# Altium PCB Photodiode7_PCB.PcbDoc
Units mil, origin at the board's own origin, x right, y up, seen from the top; angles counter-clockwise.
Board outline 4100 x 3874.83 mil, 2 copper layers (Top Layer, Bottom Layer); 82 components, 33 nets, 223 pads, 114 vias.
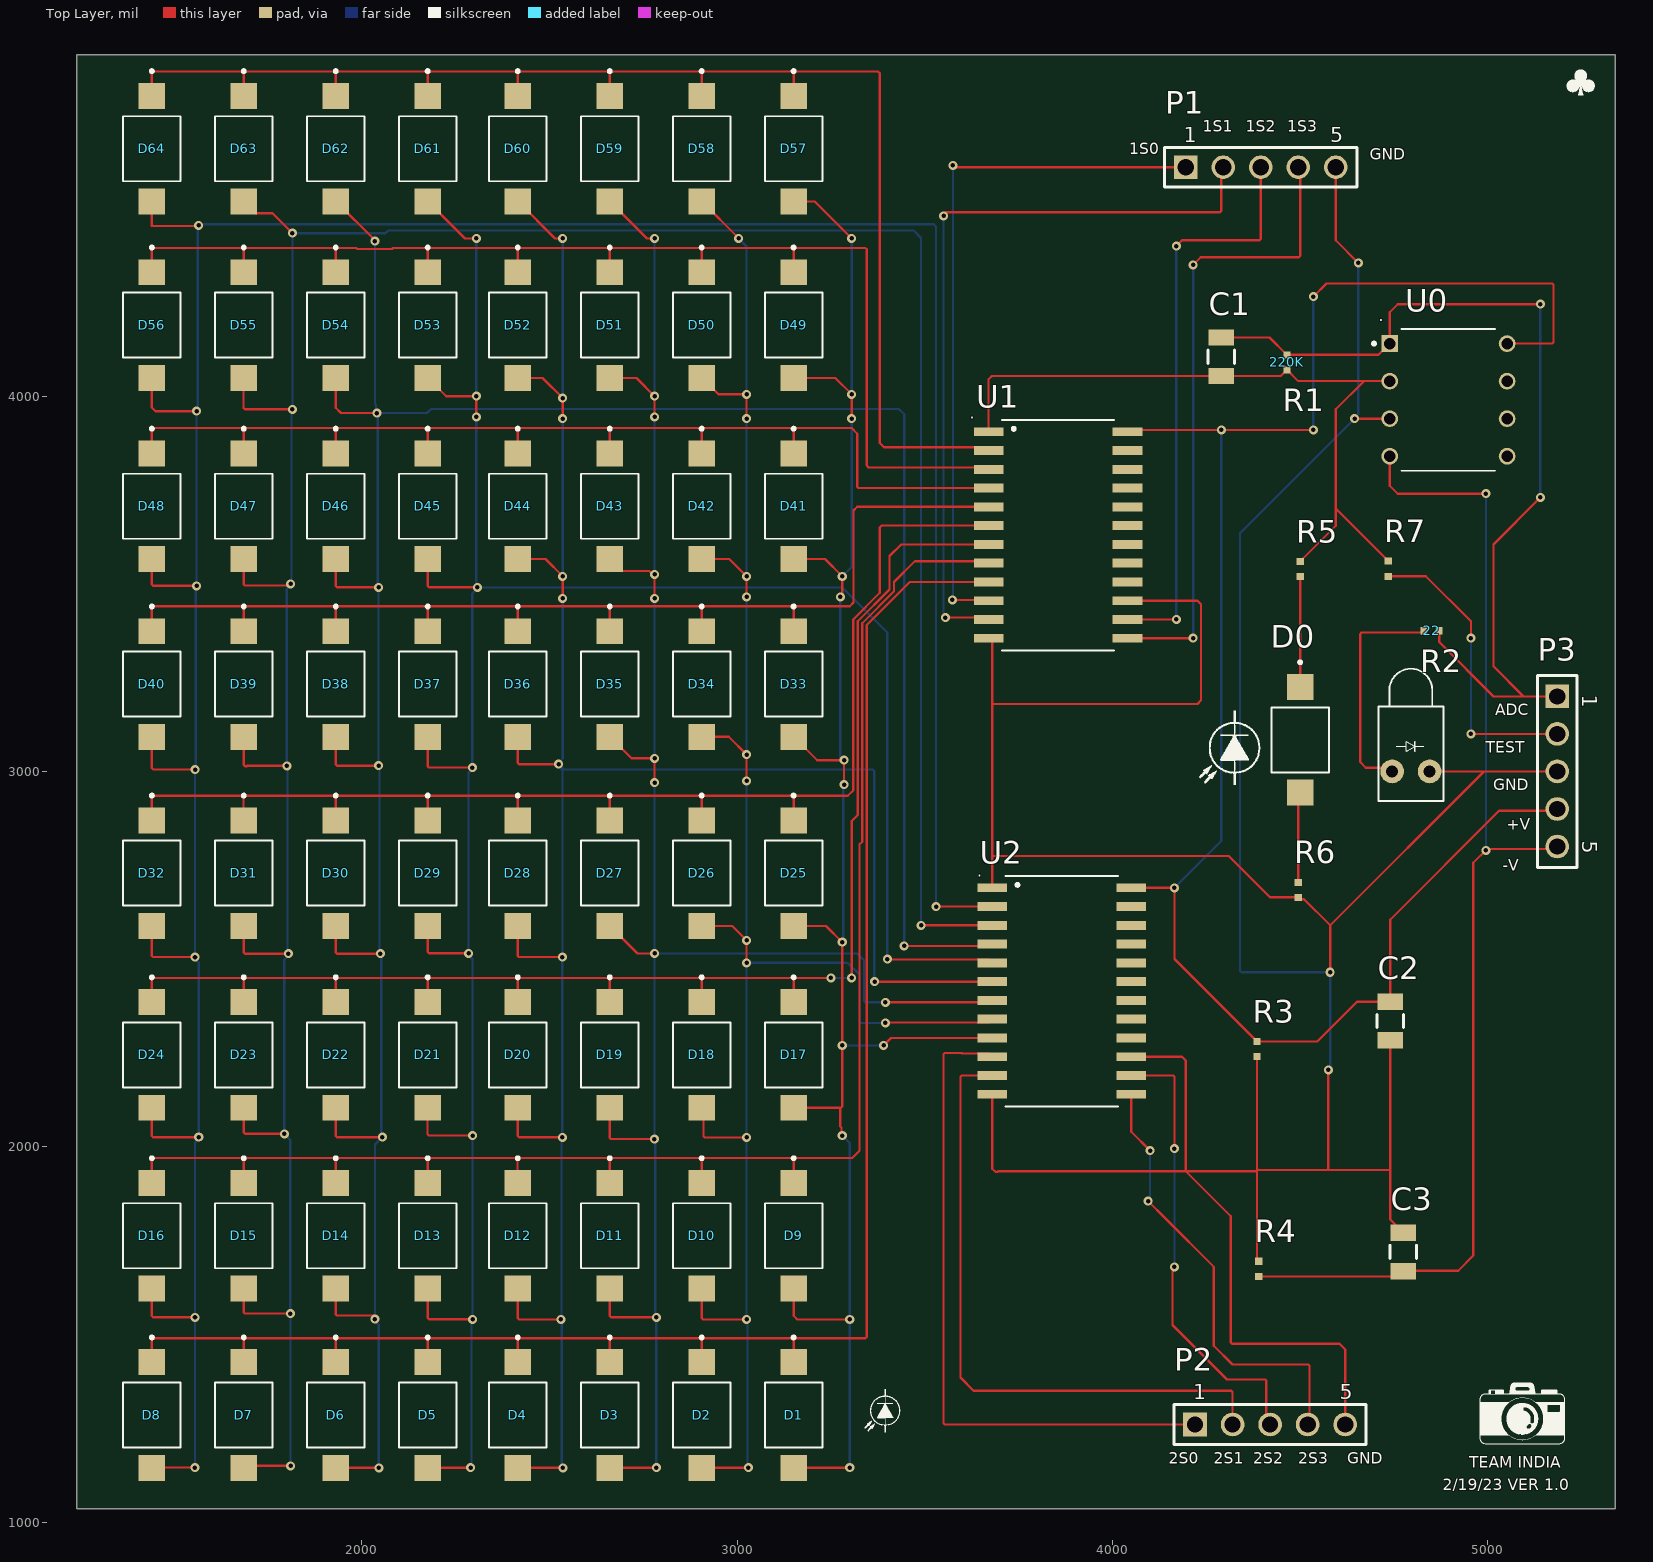
[diagram p0: Top Layer view]
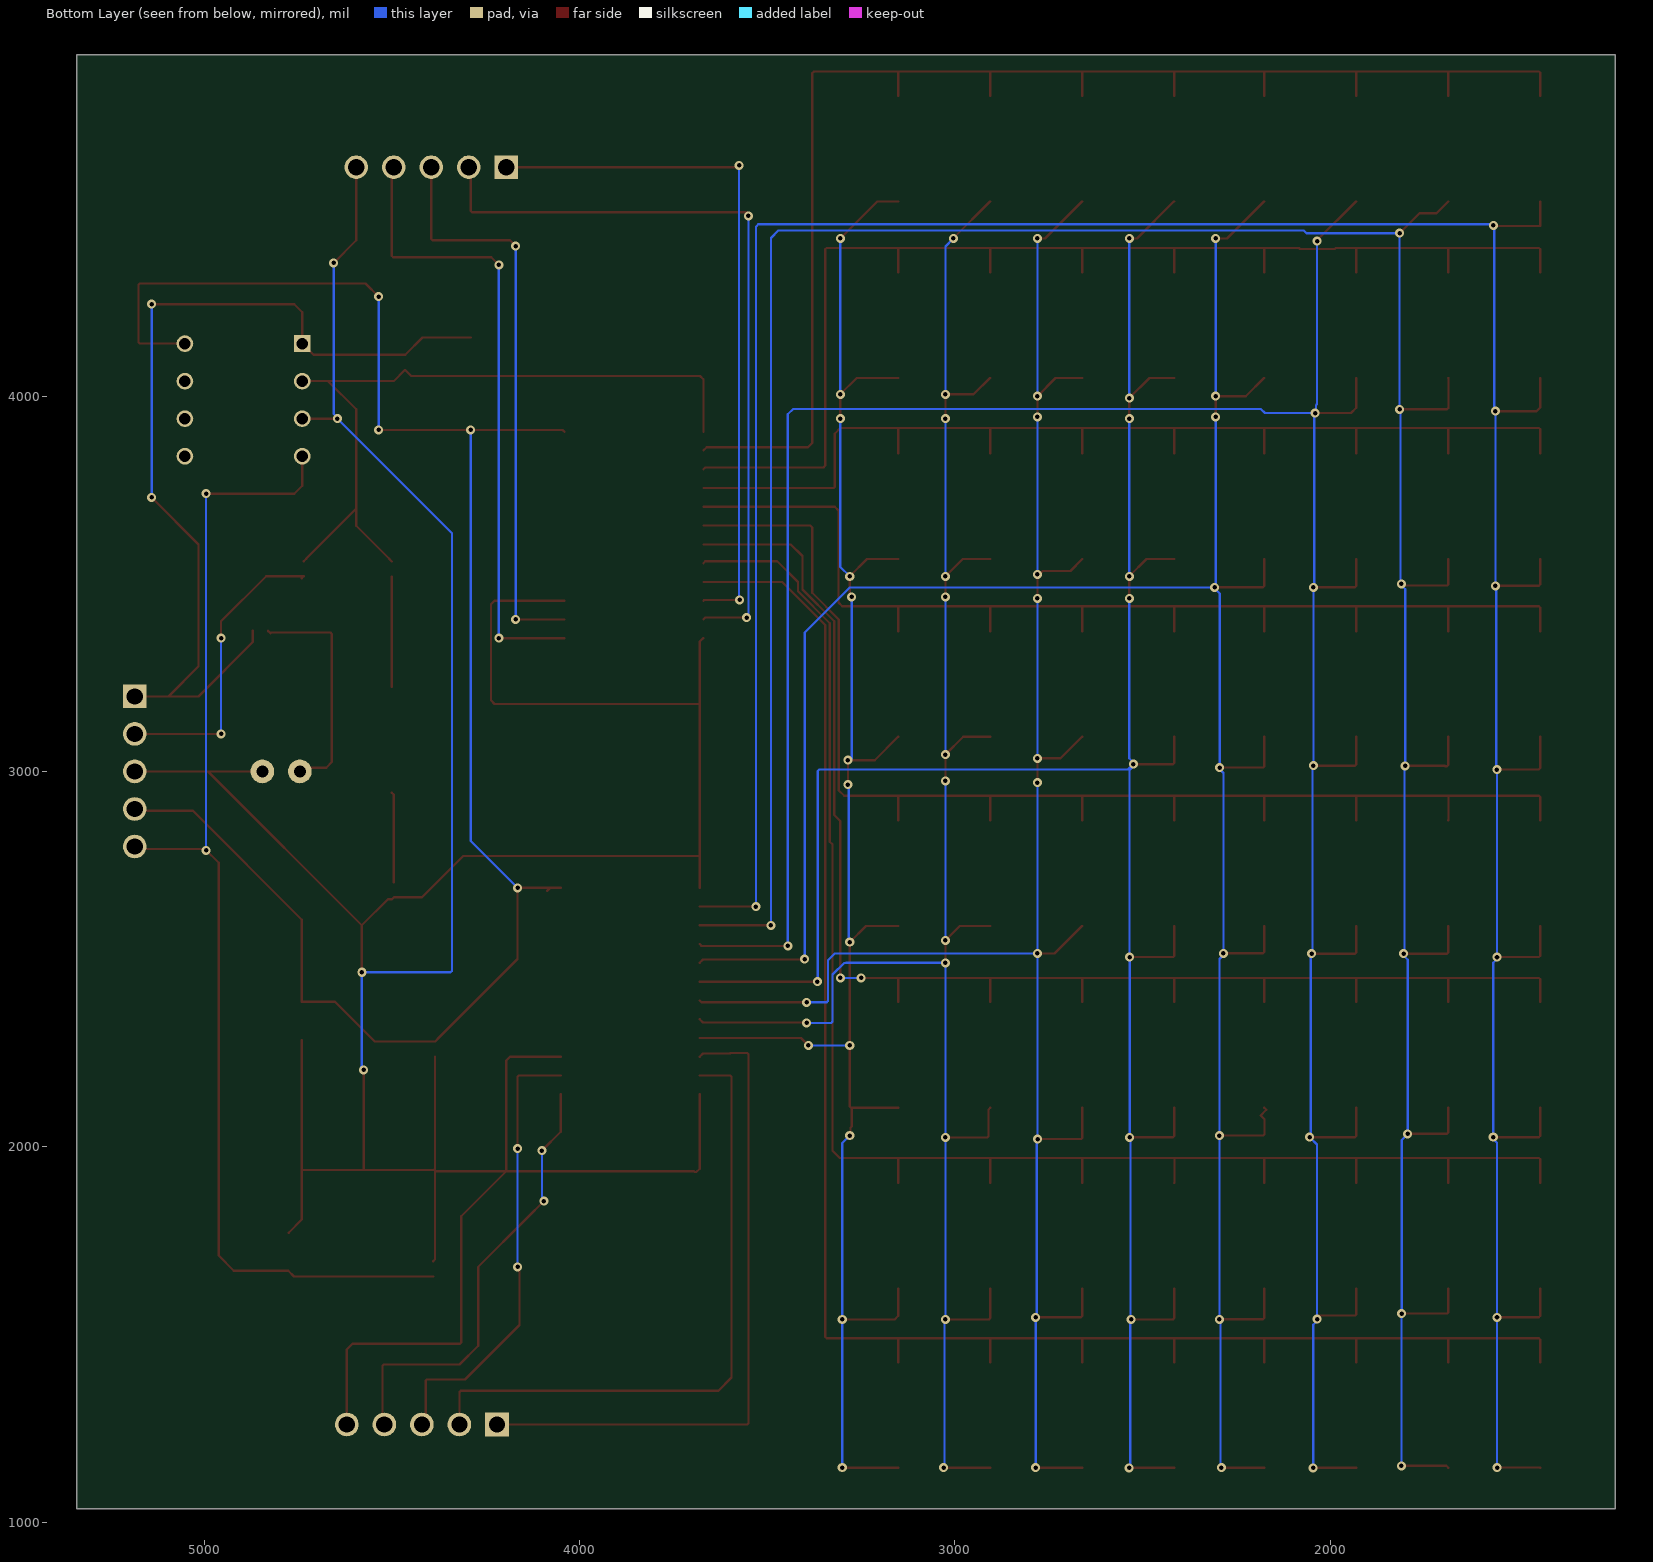
[diagram p1: Bottom Layer view, seen from below]

## Layer stack, top to bottom
Top Solder: solder mask 0.4, Solder Resist, Dk 3.5
Top Layer: signal copper 1.4
Dielectric 1: dielectric 12.6, FR-4, Dk 4.8
Bottom Layer: signal copper 1.4
Bottom Solder: solder mask 0.4, Solder Resist, Dk 3.5

## Board outline
1240,1035.17 1240,4910 5340,4910 5340,1035.17

## Design rules (kind name [scope] priority, off if disabled: settings)
BoardOutlineClearance [All] p1: gap=16 ignorepadtopadclearanceinfootprint=FALSE except(0: Arc-SplitContinuation Track-SplitContinuation SMDPad-SplitContinuation THPad-SplitContinuation Via-SplitContinuation Fill-SplitContinuation Poly-SplitContinuation Region-SplitContinuation Text-SplitContinuation)
Clearance [All] p1: gap=6 ignorepadtopadclearanceinfootprint=FALSE
HoleSize [All] p1: absolutevalues=TRUE maxlimit=245 minlimit=12 maxpercent=80.000 minpercent=20.000
MinimumSolderMaskSliver [All] p1 off: minsoldermaskwidth=10
NetAntennae [All] p1 off: netantennaetolerance=0
PolygonConnect [All] p1: connectstyle=Relief reliefconductorwidth=10 reliefentries=4 polygonreliefangle="90 Angle" airgapwidth=10
RoutingVias [All] p1: holewidth=12 width=24 viastyle="Through Hole" minholewidth=6 minwidth=12 maxholewidth=23.62 maxwidth=47.24
SilkToSilkClearance [All] p1 off: silktosilkclearance=10
SilkToSolderMaskClearance [IsPad] p1 off: minsilkscreentomaskgap=10 clearancetoexposedcopper=TRUE
SolderMaskExpansion [All] p1: expansion=4 istentingtop=FALSE
Width [All] p1: maxlimit=78.74 minlimit=6 preferedwidth=6 minimp=50.000000 maximp=50.000000 favimp=50.000000
25 further rules are at their usual default settings.

## Components (designator, comment, footprint, x,y, rotation, side; value= is the part's Value field where it differs from the comment)
22 "R2" resistor 4850,3375 r0 top
220K "R1" resistor 4465,4089.68 r90 top
C1 "12065A220JAT2A" FP-1206-L_3_2_0_2-W_1_6_0-IPC_C 4290,4105 r270 top
C2 "12065A220JAT2A" FP-1206-L_3_2_0_2-W_1_6_0-IPC_C 4740,2335 r90 top
C3 "12065A220JAT2A" FP-1206-L_3_2_0_2-W_1_6_0-IPC_C 4775,1720 r90 top
D0 "VBPW34S" VBPW34S 4500,3084.25 r270 top
D1 "VBPW34S" VBPW34S 3150.49,1285.35 r270 top
D2 "VBPW34S" VBPW34S 2905.49,1285.35 r270 top
D3 "VBPW34S" VBPW34S 2660.49,1285.35 r270 top
D4 "VBPW34S" VBPW34S 2415.49,1285.35 r270 top
D5 "VBPW34S" VBPW34S 2175.49,1285.35 r270 top
D6 "VBPW34S" VBPW34S 1930.49,1285.35 r270 top
D7 "VBPW34S" VBPW34S 1685.49,1285.35 r270 top
D8 "VBPW34S" VBPW34S 1440.49,1285.35 r270 top
D9 "VBPW34S" VBPW34S 3150.49,1762.8 r270 top
D10 "VBPW34S" VBPW34S 2905.49,1762.8 r270 top
D11 "VBPW34S" VBPW34S 2660.49,1762.8 r270 top
D12 "VBPW34S" VBPW34S 2415.49,1762.8 r270 top
D13 "VBPW34S" VBPW34S 2175.49,1762.8 r270 top
D14 "VBPW34S" VBPW34S 1930.49,1762.8 r270 top
D15 "VBPW34S" VBPW34S 1685.49,1762.8 r270 top
D16 "VBPW34S" VBPW34S 1440.49,1762.8 r270 top
D17 "VBPW34S" VBPW34S 3150.49,2244.8 r270 top
D18 "VBPW34S" VBPW34S 2905.49,2244.8 r270 top
D19 "VBPW34S" VBPW34S 2660.49,2244.8 r270 top
D20 "VBPW34S" VBPW34S 2415.49,2244.8 r270 top
D21 "VBPW34S" VBPW34S 2175.49,2244.8 r270 top
D22 "VBPW34S" VBPW34S 1930.49,2244.8 r270 top
D23 "VBPW34S" VBPW34S 1685.49,2244.8 r270 top
D24 "VBPW34S" VBPW34S 1440.49,2244.8 r270 top
D25 "VBPW34S" VBPW34S 3150.49,2729.04 r270 top
D26 "VBPW34S" VBPW34S 2905.49,2729.04 r270 top
D27 "VBPW34S" VBPW34S 2660.49,2729.04 r270 top
D28 "VBPW34S" VBPW34S 2415.49,2729.04 r270 top
D29 "VBPW34S" VBPW34S 2175.49,2729.04 r270 top
D30 "VBPW34S" VBPW34S 1930.49,2729.04 r270 top
D31 "VBPW34S" VBPW34S 1685.49,2729.04 r270 top
D32 "VBPW34S" VBPW34S 1440.49,2729.04 r270 top
D33 "VBPW34S" VBPW34S 3150.49,3232.92 r270 top
D34 "VBPW34S" VBPW34S 2905.49,3232.92 r270 top
D35 "VBPW34S" VBPW34S 2660.49,3232.92 r270 top
D36 "VBPW34S" VBPW34S 2415.49,3232.92 r270 top
D37 "VBPW34S" VBPW34S 2175.49,3232.92 r270 top
D38 "VBPW34S" VBPW34S 1930.49,3232.92 r270 top
D39 "VBPW34S" VBPW34S 1685.49,3232.92 r270 top
D40 "VBPW34S" VBPW34S 1440.49,3232.92 r270 top
D41 "VBPW34S" VBPW34S 3150.49,3706.58 r270 top
D42 "VBPW34S" VBPW34S 2905.49,3706.58 r270 top
D43 "VBPW34S" VBPW34S 2660.49,3706.58 r270 top
D44 "VBPW34S" VBPW34S 2415.49,3706.58 r270 top
D45 "VBPW34S" VBPW34S 2175.49,3706.58 r270 top
D46 "VBPW34S" VBPW34S 1930.49,3706.58 r270 top
D47 "VBPW34S" VBPW34S 1685.49,3706.58 r270 top
D48 "VBPW34S" VBPW34S 1440.49,3706.58 r270 top
D49 "VBPW34S" VBPW34S 3150.49,4189.25 r270 top
D50 "VBPW34S" VBPW34S 2905.49,4189.25 r270 top
D51 "VBPW34S" VBPW34S 2660.49,4189.25 r270 top
D52 "VBPW34S" VBPW34S 2415.49,4189.25 r270 top
D53 "VBPW34S" VBPW34S 2175.49,4189.25 r270 top
D54 "VBPW34S" VBPW34S 1930.49,4189.25 r270 top
D55 "VBPW34S" VBPW34S 1685.49,4189.25 r270 top
D56 "VBPW34S" VBPW34S 1440.49,4189.25 r270 top
D57 "VBPW34S" VBPW34S 3150.49,4659.25 r270 top
D58 "VBPW34S" VBPW34S 2905.49,4659.25 r270 top
D59 "VBPW34S" VBPW34S 2660.49,4659.25 r270 top
D60 "VBPW34S" VBPW34S 2415.49,4659.25 r270 top
D61 "VBPW34S" VBPW34S 2175.49,4659.25 r270 top
D62 "VBPW34S" VBPW34S 1930.49,4659.25 r270 top
D63 "VBPW34S" VBPW34S 1685.49,4659.25 r270 top
D64 "VBPW34S" VBPW34S 1440.49,4659.25 r270 top
P1 "61300511121" 61300511121 4395,4610 r0 top
P2 "61300511121" 61300511121 4420,1260 r0 top
P3 "61300511121" 61300511121 5185,3000 r270 top
R3 "resistor" resistor 4385,2260 r90 top
R4 "resistor" resistor 4390,1674.68 r90 top
R5 "0" resistor 4500,3539.25 r90 top
R6 "0" resistor 4495,2684.25 r90 top
R7 "0" resistor 4735,3540 r90 top
U0 "amplifier" amplifier 4875,4040 r0 top
U1 "MUX" MUX 3671,3656 r0 top
U2 "MUX" MUX 3680.92,2441 r0 top
? "LED1" LED-1 4795,3000 r90 top

## Footprints (in the part's own frame and the unit in brackets; to place one, negate y for a bottom-side part, rotate by r counter-clockwise, add the part's x,y. Pads: shape width x height; smd on the part's side, far side on the other; paste and mask are expansions set on the pad)
61300511121 [mm] "Pin Header, pitch 2.54 mm, THT, Vertical, single row, 5p"
  rect 1.6x1.6 hole 1.1: 1(-5.08,0)
  round 1.6 hole 1.1: 2(-2.54,0) 3(0,0) 4(2.54,0) 5(5.08,0)
  silkscreen extent -6.5,-1.35 6.5,1.35, body extent -6.35,-1.27 6.35,1.27, height 8.57
amplifier [mm]
  rect 1.13x1.13 hole 0.78: 1(-3.462,2.54)
  round 1.13 hole 0.78: 2(-3.462,0) 3(-3.462,-2.54) 4(-3.462,-5.08) 5(4.478,-5.08) 6(4.478,-2.54) 7(4.478,0) 8(4.478,2.54)
  silkscreen extent -4.63,-6.06 3.68,3.52
FP-1206-L_3_2_0_2-W_1_6_0-IPC_C [mil]
  rect 43.49x67.17 smd paste+0 mask+0: 1(-51.21,0) 2(51.21,0)
  silkscreen extent -18,-35 18,35, body extent -77,-39 77,39, height 10
LED-1 [mm] "LED; 2 Leads"
  round 1.6 hole 0.8: 1(0,1.27) 2(0,-1.27)
  silkscreen extent -2,-2.2 6.95,2.2
MUX [mm]
  rect 2x0.6 smd: P1(-0.025,6.325) P2(-0.025,5.055) P3(-0.025,3.785) P4(-0.025,2.515) P5(-0.025,1.245) P6(-0.025,-0.025) P7(-0.025,-1.295) P8(-0.025,-2.565) P9(-0.025,-3.835) P10(-0.025,-5.105) P11(-0.025,-6.375) P12(-0.025,-7.645) P13(9.375,-7.645) P14(9.375,-6.375) P15(9.375,-5.105) P16(9.375,-3.835) P17(9.375,-2.565) P18(9.375,-1.295) P19(9.375,-0.025) P20(9.375,1.245) P21(9.375,2.515) P22(9.375,3.785) P23(9.375,5.055) P24(9.375,6.325)
  silkscreen extent 0.87,-8.48 8.47,7.12
resistor [mm]
  rect 0.475x0.5 smd: 1(-0.508,0) 2(0.516,0)
VBPW34S [mm]
  rect 1.75x1.8 smd: A(3.575,0) K(-3.575,0)
  silkscreen extent -5.35,-1.95 2.2,1.95, body extent -4.7,-2.18 4.67,2.21, height 1.2

## Part data
22 220K R5 R6 R7: library part resistor
C1 C2 C3: library part CMP-1037-00977-2, "General Purpose Ceramic Capacitor, 1206, 22pF, 5%, NP0, 30ppm/°C, 50V", Capacitance=22pF, Case Code (Imperial)=1206, Case Code (Metric)=3216, Dielectric=C0G, Max Operating Temperature=125°C, Min Operating Temperature=-55°C, Package Quantity=1, Tolerance=5%, Voltage=50V, Case/Package=1206, Construction=Flat, Contact Plating=Tin, Depth=1.6mm, Lead Free="Lead Free", Length=3.2mm, Mount="Surface Mount", Number of Pins=2, Packaging="Tape and Reel", Radiation Hardening=No, REACH SVHC="No SVHC", RoHS Compliant=Yes, Series=-, Termination=SMD/SMT, Thickness=0.037inch, Voltage Rating=50V, Voltage Rating (DC)=50V, Width=0.063inch
D0 D1 D2 D3 D4 D5 D6 D7 D8 D9 D10 D11 D12 D13 D14 D15 D16 D17 D18 D19 D20 D21 D22 D23 D24 D25 D26 D27 D28 D29 D30 D31 D32 D33 D34 D35 D36 D37 D38 D39 D40 D41 D42 D43 D44 D45 D46 D47 D48 D49 D50 D51 D52 D53 D54 D55 D56 D57 D58 D59 D60 D61 D62 D63 D64: "Photodiode 940nm 100ns 130Â° 2-SMD, Gull Wing", Package="SMD-2 Vishay", Availability=Unavailable, MF=Vishay, MP=VBPW34S, Price=None, SnapEDA_Link=https://www.snapeda.com/parts/VBPW34S/Vishay%20Semiconductor%20Opto%20Division/view-part/139260/?ref=snap
P1 P2 P3: library part CMP-1502-01068-1, "THT Vertical Pin Header WR-PHD, Pitch 2.54 mm, Single Row, 5 pins", Contact Resistance=20mOhm, Manufacturer="Wurth Elektronik", Operating Temperature=-40to105degC, Rated Current=3A, Withstanding Voltage=500VAC, Working Voltage=250VAC, Datasheet URL=https://katalog.we-online.de/em/datasheet/6130xx11121.pdf, Gender=Male, Manufacturer URL=http://www.we-online.de, Mounting Technology=THT, Orientation=Vertical, Package Reference=61300511121, Packaging=Bag, Part Number=61300511121, Pin Number=5, Pitch=2.54mm, Publisher=WurthElektronik, Row Number=Single
U1 U2: "Analog Switch/Analog Multiplexer Single 16:1 24-Pin SSOP T/R"
?: "Typical RED GaAs LED", LatestRevisionDate=08-Jul-2005, LatestRevisionNote="Mech Layer 1 removed.", PackageDescription="LED; 2 Leads", PackageReference=LED-1, Published=8-Jun-2000, Publisher="Altium Limited"

## Via types
v1: diameter 24, hole 12, Top Layer to Bottom Layer, 114 vias

## Nets (pads, with @x,y where several pads share a name; then routed paths per layer and width w, separated by ;. In a path a pad name is that pad's centre, name@x,y a point inside that pad or via, vN(x,y) a via of type N, cw(c..) or ccw(c..) an arc to the next point about the centre after c; other vN are vias at no path point)
1S0: P1.1 U1.P10 | length 1879
  Top Layer w6: v1(3573.42,3456.95) 3668.05,3456.95 U1.P10 ; v1(3575,4615) 3575,4613.51 3578.51,4610 P1.1
  Bottom Layer w6: v1(3573.42,3456.95) 3573.42,3458.42 3575,3460 v1(3575,4615)
1S1: P1.2 U1.P11 | length 2058
  Top Layer w6: v1(3550,4480) 3553.44,4483.44 3553.44,4489.93 3553.51,4490 4286.49,4490 4290,4493.51 4290,4605 P1.2 ; v1(3555,3410) 3665,3410 U1.P11
  Bottom Layer w6: v1(3550,4480) 3550,3413.51 3553.51,3410 v1(3555,3410)
1S2: P1.3 U1.P14 | length 1549.1
  Top Layer w6: U1.P14 v1(4170,3405) ; v1(4170,4400) 4185,4415 4391.49,4415 4395,4418.51 P1.3
  Bottom Layer w6: v1(4170,3405) v1(4170,4400)
1S3: P1.4 U1.P13 | length 1703.2
  Top Layer w6: U1.P13 v1(4215,3355) ; v1(4215,4350) 4235,4370 4496.49,4370 4500,4373.51 4500,4605 P1.4
  Bottom Layer w6: v1(4215,3355) v1(4215,4350)
2S0: P2.1 U2.P10 | length 1789.9
  Top Layer w6: U2.P10 3671.11,2248.81 3599.13,2248.81 3597.94,2250 3553.51,2250 3550,2246.49 3550,1263.51 3553.51,1260 P2.1
2S1: P2.2 U2.P11 | length 1715.3
  Top Layer w6: U2.P11 3598.51,2190 3595,2186.49 3595,1385 3630,1350 4316.49,1350 4320,1346.49 P2.2
2S2: P2.3 U2.P14 | length 1212.2
  Top Layer w6: U2.P14 4161.49,2190 4165,2186.49 v1(4165,1995) ; v1(4165,1680) 4161.56,1676.56 4161.56,1669.04 4160,1667.49 4160,1525 4305,1380 4406.49,1380 4410,1376.49 4410,1270 P2.3
  Bottom Layer w6: v1(4165,1680) v1(4165,1995)
2S3: P2.4 U2.P13 | length 1201
  Top Layer w6: U2.P13 4050,2040 v1(4100,1990) ; v1(4095,1855) 4140,1810 4270,1680 4270,1470 4320,1420 4521.49,1420 4525,1416.49 4525,1265 P2.4
  Bottom Layer w6: v1(4095,1855) 4098.44,1858.44 4098.44,1865.96 4100,1867.51 v1(4100,1990)
+VCC: C2.2 P3.4 R3.2 U0.8 U1.P24 U2.P24 | length 4871.3
  Top Layer w6: U1.P24 4045.08,3910 v1(4290,3910) v1(4535,3910) ; U2.P24 U2.P24@4077.56,2690 ; U2.P24@4086.37,2681.19 U2.P24@4077.56,2690 ; v1(4535,4265) 4570,4300 5171.49,4300 5175,4296.49 5175,4143.51 5171.49,4140 U0.8 ; P3.4 5180,2895 5030,2895 4740,2605 C2.2 4651.21,2386.21 4545.31,2280.32 4384.51,2280.32 4378.16,2286.67 4378.16,2287.16 4165,2500.32 v1(4165,2690) U2.P24@4077.56,2690
  Bottom Layer w6: v1(4165,2690) 4290,2815 v1(4290,3910) ; v1(4535,3910) v1(4535,4265)
-VCC: C3.1 P3.5 R4.1 U0.4 | length 3176.2
  Top Layer w6: R4.1 4760.9,1654.68 4776.21,1670 4921.49,1670 4961.52,1710.04 4961.52,2756.52 4998.44,2793.44 5178.44,2793.44 P3.5 ; U0.4 4738.7,3761.3 4760,3740 v1(4995,3740)
  Bottom Layer w6: v1(4995,2790) v1(4995,3740)
ADC: 22.2 220K.2 C1.1 P3.1 U0.1 | length 2508.9
  Top Layer w6: C1.1 4418.3,4156.21 4464.51,4110 220K.2 4708.7,4110 U0.1 4738.7,4223.7 4760,4245 v1(5140,4245) ; 22.2 4870.31,3344.68 5015,3200 5095,3200 ; v1(5140,3730) 5015,3605 5015,3280 5095,3200 ; P3.1 5095,3200
  Bottom Layer w6: v1(5140,3730) v1(5140,4245)
Col1: D1.A D9.A D17.A D25.A D33.A D41.A D49.A D57.A U2.P9 | length 5043.8
  Top Layer w6: D1.A 3299.6,1144.6 v1(3300,1145) ; D9.A 3150.49,1549.51 3160,1540 v1(3300,1540) ; D17.A 3276.49,2104.05 ; D25.A 3236.71,2588.29 v1(3280,2545) v1(3280,2270) 3280,2107.57 3276.49,2104.05 ; D33.A 3151.47,3092.17 3213.65,3030 v1(3285,3030) v1(3285,2965) ; D41.A 3234.17,3565.83 v1(3280,3520) 3280,3468.51 3276.49,3465 v1(3275,3465) ; D49.A 3261.5,4048.5 v1(3305,4005) v1(3305,3940) ; D57.A 3206.5,4518.5 v1(3305,4420) ; v1(3280,2030) 3278,2032 3278,2051 3275,2054 3275,2102.57 3276.49,2104.05 ; v1(3390,2270) 3410,2290 U2.P9
  Bottom Layer w6: v1(3275,3465) 3275,3035 3280,3030 v1(3285,3030) ; v1(3280,2030) 3300,2010 v1(3300,1540) v1(3300,1145) ; v1(3280,2270) v1(3390,2270) ; v1(3280,2545) 3282.5,2547.5 3282.5,2962.5 v1(3285,2965) ; v1(3280,3520) 3305,3545 v1(3305,3940) ; v1(3305,4005) v1(3305,4420)
Col2: D2.A D10.A D18.A D26.A D34.A D42.A D50.A D58.A U2.P8 | length 5292.8
  Top Layer w6: D2.A 3019.6,1144.6 3020,1145 v1(3030,1145) ; D10.A 2905.49,1543.51 2909,1540 v1(3025,1540) ; D18.A 2910,2099.54 2910,2028.51 2913.51,2025 v1(3025,2025) ; D26.A 2986.71,2588.29 v1(3025,2550) v1(3025,2490) ; D34.A 2977.83,3092.17 v1(3025,3045) v1(3025,2975) ; D42.A 2979.17,3565.83 v1(3025,3520) v1(3025,3465) ; D50.A 2906.47,4048.5 2949.98,4005 v1(3025,4005) v1(3025,3940) ; D58.A 2906.47,4518.5 3003.99,4420.98 v1(3003.99,4420) ; v1(3395,2330) 3396.19,2331.19 3671.11,2331.19 U2.P8
  Bottom Layer w6: v1(3003.99,4420) 3025,4398.99 v1(3025,4005) ; v1(3025,2550) v1(3025,2975) ; v1(3025,3045) v1(3025,3465) ; v1(3025,3520) v1(3025,3940) ; v1(3030,1145) 3027.5,1147.5 3027.5,1537.5 v1(3025,1540) v1(3025,2025) v1(3025,2490) 3290,2490 3290.3,2489.7 3295,2489.7 3326,2458.7 3326,2333.51 3329.51,2330 v1(3395,2330)
Col3: D3.A D11.A D19.A D27.A D35.A D43.A D51.A D59.A U2.P7 | length 5550
  Top Layer w6: D3.A 2784.6,1144.6 v1(2785,1145) ; D11.A 2660.49,1549 2664,1545.49 v1(2784.51,1545.49) ; D19.A 2660.49,2024 2664,2020.49 v1(2779.51,2020.49) ; D27.A 2661.47,2588.29 2734.76,2515 v1(2780,2515) ; D35.A 2661.47,3092.17 2718.65,3035 v1(2780,3035) v1(2780,2970) ; D43.A 2691.94,3534.38 2765.74,3534.38 2775.13,3525 v1(2780,3525) v1(2780,3461) ; D51.A 2731.5,4048.5 v1(2780,4000) v1(2780,3945) ; D59.A 2661.47,4518.5 2759.98,4420 v1(2780,4420) ; v1(3395,2385) 3674.92,2385 U2.P7
  Bottom Layer w6: v1(2780,2970) v1(2780,2515) ; v1(2780,3035) v1(2780,3461) ; v1(2780,3525) v1(2780,3945) ; v1(2780,4000) v1(2780,4420) ; v1(2785,1145) 2784.76,1145.24 2784.76,1545.24 v1(2784.51,1545.49) 2782.01,1547.99 2782.01,2017.99 v1(2779.51,2020.49) 2779.76,2020.73 2779.76,2514.76 v1(2780,2515) ; v1(3395,2385) 3341.51,2385 3338,2388.51 3338,2497 3320,2515 v1(2780,2515)
Col4: D4.A D12.A D20.A D28.A D36.A D44.A D52.A D60.A U2.P6 | length 6341.7
  Top Layer w6: D4.A v1(2535.4,1144.6) ; D12.A 2415.49,1543.51 2419,1540 v1(2530,1540) ; D20.A 2415.49,2029 2419,2025.49 2533.53,2025.49 v1(2534.02,2025) ; D28.A 2415.49,2509 2419,2505.49 v1(2534.51,2505.49) ; D36.A 2415.49,3023.03 2419,3019.51 v1(2524,3019.51) ; D44.A 2489.17,3565.83 v1(2535,3520) v1(2535,3461) ; D52.A 2481.5,4048.5 v1(2535,3995) v1(2535,3940) ; D60.A 2416.47,4518.5 2514.98,4420 v1(2535,4420) ; v1(3366,2440) U2.P6
  Bottom Layer w6: v1(2535,3461) 2535,3035.38 2524,3024.38 v1(2524,3019.51) ; v1(2535,3520) v1(2535,3940) ; v1(2535,3995) v1(2535,4420) ; v1(2535.4,1144.6) 2532.7,1147.3 2532.7,1537.3 v1(2530,1540) 2532.01,1542.01 2532.01,2022.99 v1(2534.02,2025) 2534.27,2025.24 2534.27,2505.24 v1(2534.51,2505.49) 2534.51,3004.13 2524,3014.64 v1(2524,3019.51) ; v1(3366,2440) 3365,2441 3365,3001.49 3361.49,3005 2538.51,3005 v1(2524,3019.51)
Col5: D5.A D13.A D21.A D29.A D37.A D45.A D53.A D61.A U2.P5 | length 7011
  Top Layer w6: D5.A 2289.6,1144.6 v1(2290,1145) ; D13.A 2175.49,1544 2179,1540.49 2294.51,1540.49 v1(2295,1540) ; D21.A 2170,2098.56 2185,2083.56 2175,2073.56 2175,2033.51 2178.51,2030 v1(2295,2030) ; D29.A 2175.49,2519 2179,2515.49 v1(2284.51,2515.49) ; D37.A 2175.49,3014 2179,3010.49 v1(2294.51,3010.49) ; D45.A 2175.49,3494 2179,3490.49 v1(2308.03,3490.49) ; D53.A 2176.47,4048.5 2224.98,4000 v1(2305,4000) v1(2305,3945) ; D61.A 2176.47,4518.5 2274.98,4420 v1(2305,4420) ; v1(3400,2500) 3401.19,2498.81 3671.11,2498.81 U2.P5
  Bottom Layer w6: v1(2290,1145) 2292.5,1147.5 2292.5,1537.5 v1(2295,1540) v1(2295,2030) 2295,2500.13 2284.51,2510.62 v1(2284.51,2515.49) 2284.51,2995.62 2294.51,3005.62 v1(2294.51,3010.49) 2294.51,3474.31 2308.03,3487.82 v1(2308.03,3490.49) ; v1(2305,3945) 2305,3493.51 v1(2308.03,3490.49) ; v1(2305,4000) v1(2305,4420) ; v1(3400,2500) 3400,3370 3280,3490 2308.51,3490 v1(2308.03,3490.49)
Col6: D6.A D14.A D22.A D30.A D38.A D46.A D54.A D62.A U2.P4 | length 7767.1
  Top Layer w6: D6.A v1(2045.4,1144.6) ; D14.A 1930.49,1554 1934,1550.49 2032.51,1550.49 2036.03,1546.97 2036.03,1542 v1(2035,1540.98) ; D22.A 1930.49,2029 1934,2025.49 v1(2054.51,2025.49) ; D30.A 1930.49,2518.03 1934,2514.51 v1(2049.51,2514.51) ; D38.A 1930.49,3019 1934,3015.49 v1(2044.51,3015.49) ; D46.A 1930.49,3494 1934,3490.49 v1(2044.51,3490.49) ; D54.A 1930.49,3969 1944.49,3955 v1(2040,3955) ; D62.A 1931.47,4518.5 2034.98,4415 v1(2034.98,4413) ; v1(3445,2535) 3674.92,2535 U2.P4
  Bottom Layer w6: v1(2034.98,4413) 2034.98,3979 2037.98,3976 2037.98,3957.02 v1(2040,3955) ; v1(2045.4,1144.6) 2045.4,1525.71 2035,1536.11 v1(2035,1540.98) 2035,2005.98 v1(2054.51,2025.49) 2052.01,2027.99 2052.01,2512.01 v1(2049.51,2514.51) 2047.01,2517.01 2047.01,3012.99 v1(2044.51,3015.49) v1(2044.51,3490.49) 2042.26,3492.74 2042.26,3952.74 v1(2040,3955) ; v1(3445,2535) 3445,3951.49 3430.49,3966 2184.78,3966 2173.78,3955 v1(2040,3955)
Col7: D7.A D15.A D23.A D31.A D39.A D47.A D55.A D63.A U2.P3 | length 8454.8
  Top Layer w6: D7.A 1690.89,1150 v1(1810,1150) ; D15.A 1685.49,1559 1689,1555.49 v1(1809.51,1555.49) ; D23.A 1685.49,2038.03 1689,2034.51 v1(1793.31,2034.51) ; D31.A 1685.49,2518.03 1689,2514.51 v1(1804.51,2514.51) ; D39.A 1685.49,3017.49 1689,3013.97 1693.97,3013.97 1695,3015 v1(1800,3015) ; D47.A 1685.49,3499 1689,3495.49 1806.49,3495.49 1810,3499 v1(1810,3500) ; D55.A 1685,4048.01 1685,3968.51 1688.51,3965 v1(1815,3965) ; D63.A 1716.94,4487.06 1761.94,4487.06 v1(1815,4434) ; v1(3490,2590) U2.P3
  Bottom Layer w6: v1(1810,1150) 1809.76,1150.24 1809.76,1555.24 v1(1809.51,1555.49) 1809.51,2018.31 v1(1793.31,2034.51) 1793.31,2498.43 1804.51,2509.64 v1(1804.51,2514.51) 1802.26,2516.77 1802.26,3012.74 v1(1800,3015) 1800,3485.13 1810,3495.13 v1(1810,3500) 1812.5,3502.5 1812.5,3962.5 v1(1815,3965) v1(1815,4434) 2063.28,4434 2070.28,4441 3470.49,4441 3490,4421.49 v1(3490,2590)
Col8: D8.A D16.A D24.A D32.A D40.A D48.A D56.A D64.A U2.P2 | length 8735.4
  Top Layer w6: D8.A 1441.29,1145.4 v1(1555.4,1145.4) ; D16.A 1440.49,1549 1444,1545.49 v1(1555.49,1545.49) ; D24.A 1440.49,2029 1444,2025.49 v1(1565.49,2025.49) ; D32.A 1440.49,2509 1444,2505.49 v1(1555.49,2505.49) ; D40.A 1440.49,3009 1444,3005.49 1555.49,3005.49 v1(1555.98,3005) ; D48.A 1440.49,3498.03 1444,3494.51 v1(1559.51,3494.51) ; D56.A 1440.49,3969.51 1450,3960 v1(1560,3960) ; D64.A 1440.49,4453.51 1563.51,4453.51 v1(1565,4455) ; v1(3530,2640) U2.P2
  Bottom Layer w6: v1(1555.4,1145.4) v1(1555.4,1145.4) 1555.44,1545.44 v1(1555.49,1545.49) 1555.49,2010.62 1565.49,2020.62 v1(1565.49,2025.49) 1565.49,2490.62 1555.49,2500.62 v1(1555.49,2505.49) 1555.73,2505.73 1555.73,3004.76 v1(1555.98,3005) 1557.74,3006.77 1557.74,3492.74 v1(1559.51,3494.51) 1559.76,3494.76 1559.76,3959.76 v1(1560,3960) 1562.5,3962.5 1562.5,4452.5 1568,4458 3523.49,4458 3530,4451.49 v1(3530,2640)
GND: ?.2 C2.1 C3.2 P1.5 P2.5 P3.3 R3.1 R4.2 R6.1 U0.3 U1.P12 U1.P15 U2.P1 U2.P12 U2.P15 | length 10687.1
  Top Layer w6: U1.P12 3671.11,3355 3679.92,3346.19 3679.92,3180 ; U2.P12 3679.92,1941.49 3688.93,1932.49 3692.49,1932.49 3695,1935 4195,1935 ; U2.P1 3679.92,2771.49 ; U1.P15 4226.49,3455 4236,3445.49 4236,3189.51 4226.49,3180 3679.92,3180 ; U2.P15 4185,2240 4195,2230 4195,1935 ; R3.1 4385,1940.74 4387.5,1938.24 ; R4.2 4385,1700 4385,1935 ; v1(4575,2205) 4575,1938.24 ; v1(4580,2465) 4579.99,2469.99 4580,2590 ; P1.5 4595,4415 v1(4655,4355) ; P2.5 4620,1460 4605,1475 4318.51,1475 4315,1478.51 4315,1815 4195,1935 ; v1(4645,3940) U0.3 ; 4740,1940 4738.24,1938.24 4575,1938.24 ; C2.1 4740,1938.24 4740,1806.21 C3.2 ; ?.2 4990,3000 ; P3.3@5175,3010 P3.3 4990,3000 ; 3679.92,2771.49 3683.44,2775 4310,2775 4420,2665 4494.25,2665 4499.58,2659.67 4510.33,2659.67 4580,2590 ; 3679.92,2771.49 3679.92,3180 ; 4195,1935 4385,1935 ; 4385,1935 4385,1938.24 4387.5,1938.24 ; 4387.5,1938.24 4390,1938.24 4575,1938.24 ; 4580,2590 4990,3000
  Bottom Layer w6: v1(4575,2205) 4575,2206.97 4581.51,2213.49 4580,2215 v1(4580,2465) 4343.51,2465 4340,2468.51 4340,3635 v1(4645,3940) 4645,3942.51 4655,3952.51 v1(4655,4355)
Net22_1: 22.1 ?.1 | length 620.3
  Top Layer w6: ?.1 4735,3010 4675,3010 4660,3025 4660,3366.49 4663.51,3370 4825,3370 22.1 4830,3374.51 4823.65,3368.16 22.1@4823.16,3368.16
Net220K_1: 220K.1 C1.2 R5.2 R7.2 U0.2 U1.P1 | length 1981.7
  Top Layer w6: U1.P1 3670,4045 3678.79,4053.79 C1.2 4448.61,4053.79 4464.51,4069.68 220K.1 4465.49,4069.68 4495.18,4040 4670,4040 ; R5.2 4500.49,3559.57 4506.84,3565.92 4506.84,3566.41 4595,3654.57 4595,3700.32 ; R7.2@4734.25,3559.57 R7.2 4734.51,3560.32 4728.16,3566.67 4728.16,3567.16 4595,3700.32 ; U0.2 4670,4040 ; 4595,3700.32 4595,3965 4670,4040
NetD0_A: D0.A R6.2 | length 241
  Top Layer w6: R6.2 4495,2938.5 D0.A
NetD0_K: D0.K R5.1 | length 294.3
  Top Layer w6: D0.K R5.1
NetP3_2: P3.2 R7.1 | length 808.9
  Top Layer w6: R7.1@4740,3515 R7.1 4835,3520 4955,3400 v1(4955,3355) ; v1(4955,3100) P3.2
  Bottom Layer w6: v1(4955,3100) 4957.51,3102.51 4957.51,3107.49 4955,3110 v1(4955,3355)
Row1: D1.K D2.K D3.K D4.K D5.K D6.K D7.K D8.K U1.P9 | length 4685.7
  Top Layer w6: D8.K 1440.49,1486.49 1444,1490 1685,1490 ; D7.K 1685.49,1489.51 1685,1490 ; D6.K 1930.49,1489.51 1930,1490 ; D5.K 2175.49,1489.51 2175,1490 ; D4.K 2415.49,1489.51 2415,1490 ; D3.K 2660.49,1489.51 2660,1490 ; D2.K 2905.49,1489.51 2905,1490 ; D1.K 3150.49,1489.51 3150,1490 ; U1.P9 3460,3505 3345,3390 3345,1493.51 3341.49,1490 3150,1490 ; 1685,1490 1930,1490 ; 1930,1490 2175,1490 ; 2175,1490 2415,1490 ; 2415,1490 2660,1490 ; 2660,1490 2905,1490 ; 2905,1490 3150,1490
Row2: D9.K D10.K D11.K D12.K D13.K D14.K D15.K D16.K U1.P8 | length 4254.7
  Top Layer w6: D16.K 1440.49,1966.49 1444,1970 1685,1970 ; D15.K 1685.49,1969.51 1685,1970 ; D14.K 1930.49,1969.51 1930,1970 ; D13.K 2175.49,1969.51 2175,1970 ; D12.K 2415,1904.04 2415,1970 ; D11.K 2660.49,1969.51 2660,1970 ; D10.K 2905.49,1969.51 2905,1970 ; D9.K 3150.49,1969.51 3150,1970 ; U1.P8 3665,3560 3473.51,3560 3418,3504.49 3418,3479.97 3333,3394.97 3333,2813 3326,2806 3326,1989.51 3306.49,1970 3150,1970 ; 1685,1970 1930,1970 ; 1930,1970 2175,1970 ; 2175,1970 2415,1970 ; 2415,1970 2660,1970 ; 2660,1970 2905,1970 ; 2905,1970 3150,1970
Row3: D17.K D18.K D19.K D20.K D21.K D22.K D23.K D24.K U1.P7 | length 3822.2
  Top Layer w6: D24.K 1440.49,2446.49 1444,2450 1685,2450 ; D23.K 1685.49,2449.51 1685,2450 ; D22.K 1930.49,2449.51 1930,2450 ; D21.K 2175.49,2449.51 2175,2450 ; D20.K 2415.49,2449.51 2415,2450 ; D19.K 2660.49,2449.51 2660,2450 ; D18.K 2905.49,2449.51 2905,2450 ; D17.K 3150.49,2449.51 3150,2450 ; v1(3250,2450) 3150,2450 ; v1(3305,2450) 3305,2868.03 3321,2884.03 3321,3399.94 3406,3484.94 3406,3574.03 3436.97,3605 U1.P7 ; 1685,2450 1930,2450 ; 1930,2450 2175,2450 ; 2175,2450 2415,2450 ; 2415,2450 2660,2450 ; 2660,2450 2905,2450 ; 2905,2450 3150,2450
  Bottom Layer w6: v1(3250,2450) v1(3305,2450)
Row4: D25.K D26.K D27.K D28.K D29.K D30.K D31.K D32.K U1.P6 | length 3418.4
  Top Layer w6: D32.K 1440,2870.27 1440,2931.49 1443.51,2935 1685,2935 ; D31.K 1685,2870.27 1685,2935 ; D30.K 1930.49,2934.51 1930,2935 ; D29.K 2175.49,2934.51 2175,2935 ; D28.K 2415.49,2934.51 2415,2935 ; D27.K 2660.49,2934.51 2660,2935 ; D26.K 2905.49,2934.51 2905,2935 ; D25.K 3150.49,2934.51 3150,2935 ; U1.P6 3385,3655 3380,3650 3380,3475.91 3309,3404.91 3309,2949.3 3294.7,2935 3150,2935 ; 1685,2935 1930,2935 ; 1930,2935 2175,2935 ; 2175,2935 2415,2935 ; 2415,2935 2660,2935 ; 2660,2935 2905,2935 ; 2905,2935 3150,2935
Row5: D33.K D34.K D35.K D36.K D37.K D38.K D39.K D40.K U1.P5 | length 3012.8
  Top Layer w6: D40.K 1440.49,3436.49 1444,3440 1685,3440 ; D39.K 1685.49,3439.51 1685,3440 ; D38.K 1930.49,3439.51 1930,3440 ; D37.K 2175.49,3439.51 2175,3440 ; D36.K 2415.49,3439.51 2415,3440 ; D35.K 2660.49,3439.51 2660,3440 ; D34.K 2905.49,3439.51 2905,3440 ; D33.K 3150.49,3439.51 3150,3440 ; U1.P5 3320,3705 3310,3695 3310,3450 3300,3440 3150,3440 ; 1685,3440 1930,3440 ; 1930,3440 2175,3440 ; 2175,3440 2415,3440 ; 2415,3440 2660,3440 ; 2660,3440 2905,3440 ; 2905,3440 3150,3440
Row6: D41.K D42.K D43.K D44.K D45.K D46.K D47.K D48.K U1.P4 | length 2919.4
  Top Layer w6: D48.K 1440.49,3911.49 1444,3915 1685,3915 ; D47.K 1685.49,3914.51 1685,3915 ; D46.K 1930.49,3914.51 1930,3915 ; D45.K 2175.49,3914.51 2175,3915 ; D44.K 2415.49,3914.51 2415,3915 ; D43.K 2660.49,3914.51 2660,3915 ; D42.K 2905.49,3914.51 2905,3915 ; D41.K 3150.49,3914.51 3150,3915 ; U1.P4 3323.51,3755 3320,3758.51 3320,3900 3305,3915 3150,3915 ; 1685,3915 1930,3915 ; 1930,3915 2175,3915 ; 2175,3915 2415,3915 ; 2415,3915 2660,3915 ; 2660,3915 2905,3915 ; 2905,3915 3150,3915
Row7: D49.K D50.K D51.K D52.K D53.K D54.K D55.K D56.K U1.P3 | length 3333.4
  Top Layer w6: D56.K 1440.49,4391.49 1444,4395 1685,4395 ; D55.K 1685.49,4394.51 1685,4395 ; D54.K 1930.49,4394.51 1930,4395 ; D53.K 2175.49,4394.51 2175,4395 ; D52.K 2415.49,4394.51 2415,4395 ; D51.K 2660.49,4394.51 2660,4395 ; D50.K 2905.49,4394.51 2905,4395 ; D49.K 3150.49,4394.51 3150,4395 ; U1.P3 3665,3810 3350,3810 3345,3815 3345,4391.49 3341.49,4395 3150,4395 ; 1685,4395 1930,4395 ; 1930,4395 1985.34,4395 1988.34,4392 2080.17,4392 2083.17,4395 2175,4395 ; 2175,4395 2415,4395 ; 2415,4395 2660,4395 ; 2660,4395 2905,4395 ; 2905,4395 3150,4395
Row8: D57.K D58.K D59.K D60.K D61.K D62.K D63.K D64.K U1.P2 | length 3744.2
  Top Layer w6: D64.K 1440.49,4861.49 1444,4865 1685,4865 ; D63.K 1685.49,4864.51 1685,4865 ; D62.K 1930.49,4864.51 1930,4865 ; D61.K 2175.49,4864.51 2175,4865 ; D60.K 2415.49,4864.51 2415,4865 ; D59.K 2660.49,4864.51 2660,4865 ; D58.K 2905.49,4864.51 2905,4865 ; D57.K 3150.49,4864.51 3150,4865 ; U1.P2 3661.19,3863.81 3391.19,3863.81 3380,3875 3380,4860 3375,4865 3150,4865 ; 1685,4865 1930,4865 ; 1930,4865 2175,4865 ; 2175,4865 2415,4865 ; 2415,4865 2660,4865 ; 2660,4865 2905,4865 ; 2905,4865 3150,4865
pads on no net: U0.5 U0.6 U0.7 U1.P16 U1.P17 U1.P18 U1.P19 U1.P20 U1.P21 U1.P22 U1.P23 U2.P16 U2.P17 U2.P18 U2.P19 U2.P20 U2.P21 U2.P22 U2.P23

## Silkscreen, mask and mechanical layers (free items; w line width, h text height)
Top Overlay:
  drawing of 10 lines, arcs and shapes, not listed
  text "1S1" at 4240,4705 h30
  text "1S2" at 4355,4705 h30
  text "1S3" at 4465,4705 h30
  text "1S0" at 4045,4645 h30
  text "GND" at 4685,4630 h30
  text "." at 4710,4200 h30
  text "." at 3620,3940 h30
  text "ADC" at 5020,3150 h30
  text "TEST" at 4995,3050 h30
  text "GND" at 5015,2950 h30
  text "+V" at 5050,2845 h30
  text "-V" at 5040,2735 h30
  text "." at 3640,2720 h30
  text "2S0" at 4150,1155 h30
  text "2S1" at 4270,1155 h30
  text "2S2" at 4375,1155 h30
  text "2S3" at 4495,1155 h30
  text "GND" at 4625,1155 h30
  text "TEAM INDIA" at 4950,1145 h30
  text "2/19/23 VER 1.0" at 4880,1085 h30
Board Outline:
  lines w0.39: 4780.04,1035.17 5340.04,1035.17 ; 1240,1035.17 5340,1035.17 5340,4910 1240,4910 1240,1035.17

## Text inside footprints (layer, text, board x,y; h text height)
D0: 3D Bodies "phtodiode" at 4586.79,3255.71 h15.75 r270
D1: 3D Bodies "phtodiode" at 3237.28,1456.8 h15.75 r270
D2: 3D Bodies "phtodiode" at 2992.28,1456.8 h15.75 r270
D3: 3D Bodies "phtodiode" at 2747.28,1456.8 h15.75 r270
D4: 3D Bodies "phtodiode" at 2502.28,1456.8 h15.75 r270
D5: 3D Bodies "phtodiode" at 2262.28,1456.8 h15.75 r270
D6: 3D Bodies "phtodiode" at 2017.28,1456.8 h15.75 r270
D7: 3D Bodies "phtodiode" at 1772.28,1456.8 h15.75 r270
D8: 3D Bodies "phtodiode" at 1527.28,1456.8 h15.75 r270
D9: 3D Bodies "phtodiode" at 3237.28,1934.26 h15.75 r270
D10: 3D Bodies "phtodiode" at 2992.28,1934.26 h15.75 r270
D11: 3D Bodies "phtodiode" at 2747.28,1934.26 h15.75 r270
D12: 3D Bodies "phtodiode" at 2502.28,1934.26 h15.75 r270
D13: 3D Bodies "phtodiode" at 2262.28,1934.26 h15.75 r270
D14: 3D Bodies "phtodiode" at 2017.28,1934.26 h15.75 r270
D15: 3D Bodies "phtodiode" at 1772.28,1934.26 h15.75 r270
D16: 3D Bodies "phtodiode" at 1527.28,1934.26 h15.75 r270
D17: 3D Bodies "phtodiode" at 3237.28,2416.26 h15.75 r270
D18: 3D Bodies "phtodiode" at 2992.28,2416.26 h15.75 r270
D19: 3D Bodies "phtodiode" at 2747.28,2416.26 h15.75 r270
D20: 3D Bodies "phtodiode" at 2502.28,2416.26 h15.75 r270
D21: 3D Bodies "phtodiode" at 2262.28,2416.26 h15.75 r270
D22: 3D Bodies "phtodiode" at 2017.28,2416.26 h15.75 r270
D23: 3D Bodies "phtodiode" at 1772.28,2416.26 h15.75 r270
D24: 3D Bodies "phtodiode" at 1527.28,2416.26 h15.75 r270
D25: 3D Bodies "phtodiode" at 3237.28,2900.49 h15.75 r270
D26: 3D Bodies "phtodiode" at 2992.28,2900.49 h15.75 r270
D27: 3D Bodies "phtodiode" at 2747.28,2900.49 h15.75 r270
D28: 3D Bodies "phtodiode" at 2502.28,2900.49 h15.75 r270
D29: 3D Bodies "phtodiode" at 2262.28,2900.49 h15.75 r270
D30: 3D Bodies "phtodiode" at 2017.28,2900.49 h15.75 r270
D31: 3D Bodies "phtodiode" at 1772.28,2900.49 h15.75 r270
D32: 3D Bodies "phtodiode" at 1527.28,2900.49 h15.75 r270
D33: 3D Bodies "phtodiode" at 3237.28,3404.38 h15.75 r270
D34: 3D Bodies "phtodiode" at 2992.28,3404.38 h15.75 r270
D35: 3D Bodies "phtodiode" at 2747.28,3404.38 h15.75 r270
D36: 3D Bodies "phtodiode" at 2502.28,3404.38 h15.75 r270
D37: 3D Bodies "phtodiode" at 2262.28,3404.38 h15.75 r270
D38: 3D Bodies "phtodiode" at 2017.28,3404.38 h15.75 r270
D39: 3D Bodies "phtodiode" at 1772.28,3404.38 h15.75 r270
D40: 3D Bodies "phtodiode" at 1527.28,3404.38 h15.75 r270
D41: 3D Bodies "phtodiode" at 3237.28,3878.04 h15.75 r270
D42: 3D Bodies "phtodiode" at 2992.28,3878.04 h15.75 r270
D43: 3D Bodies "phtodiode" at 2747.28,3878.04 h15.75 r270
D44: 3D Bodies "phtodiode" at 2502.28,3878.04 h15.75 r270
D45: 3D Bodies "phtodiode" at 2262.28,3878.04 h15.75 r270
D46: 3D Bodies "phtodiode" at 2017.28,3878.04 h15.75 r270
D47: 3D Bodies "phtodiode" at 1772.28,3878.04 h15.75 r270
D48: 3D Bodies "phtodiode" at 1527.28,3878.04 h15.75 r270
D49: 3D Bodies "phtodiode" at 3237.28,4360.71 h15.75 r270
D50: 3D Bodies "phtodiode" at 2992.28,4360.71 h15.75 r270
D51: 3D Bodies "phtodiode" at 2747.28,4360.71 h15.75 r270
D52: 3D Bodies "phtodiode" at 2502.28,4360.71 h15.75 r270
D53: 3D Bodies "phtodiode" at 2262.28,4360.71 h15.75 r270
D54: 3D Bodies "phtodiode" at 2017.28,4360.71 h15.75 r270
D55: 3D Bodies "phtodiode" at 1772.28,4360.71 h15.75 r270
D56: 3D Bodies "phtodiode" at 1527.28,4360.71 h15.75 r270
D57: 3D Bodies "phtodiode" at 3237.28,4830.71 h15.75 r270
D58: 3D Bodies "phtodiode" at 2992.28,4830.71 h15.75 r270
D59: 3D Bodies "phtodiode" at 2747.28,4830.71 h15.75 r270
D60: 3D Bodies "phtodiode" at 2502.28,4830.71 h15.75 r270
D61: 3D Bodies "phtodiode" at 2262.28,4830.71 h15.75 r270
D62: 3D Bodies "phtodiode" at 2017.28,4830.71 h15.75 r270
D63: 3D Bodies "phtodiode" at 1772.28,4830.71 h15.75 r270
D64: 3D Bodies "phtodiode" at 1527.28,4830.71 h15.75 r270
P1: Top Overlay "5" at 4580.04,4676.93 h40; Top Overlay "1" at 4190.28,4676.93 h40
P2: Top Overlay "5" at 4605.04,1326.93 h40; Top Overlay "1" at 4215.28,1326.93 h40
P3: Top Overlay "5" at 5251.93,2814.96 h40 r270; Top Overlay "1" at 5251.93,3204.72 h40 r270